# Altium PCB PCB2.PcbDoc
Units mil, origin at the board's own origin, x right, y up, seen from the top; angles counter-clockwise.
Board outline 6000 x 4000 mil, 2 copper layers (Top Layer, Bottom Layer); 31 components, 25 nets, 180 pads, 0 vias.
Unrouted connection lines stored in the file: 85.
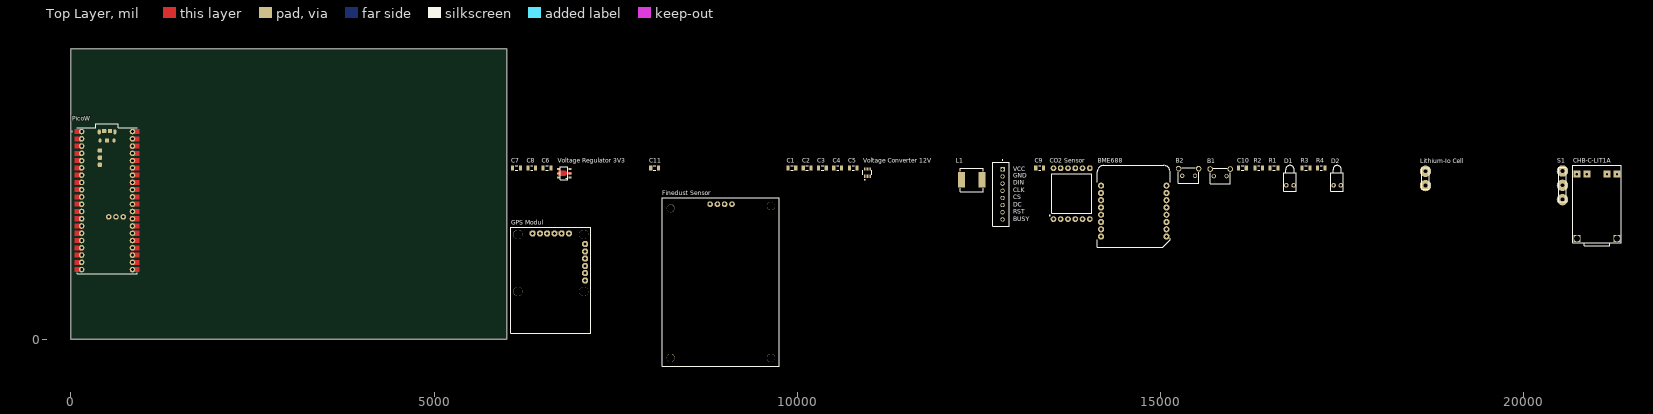
[diagram p0: Top Layer view]
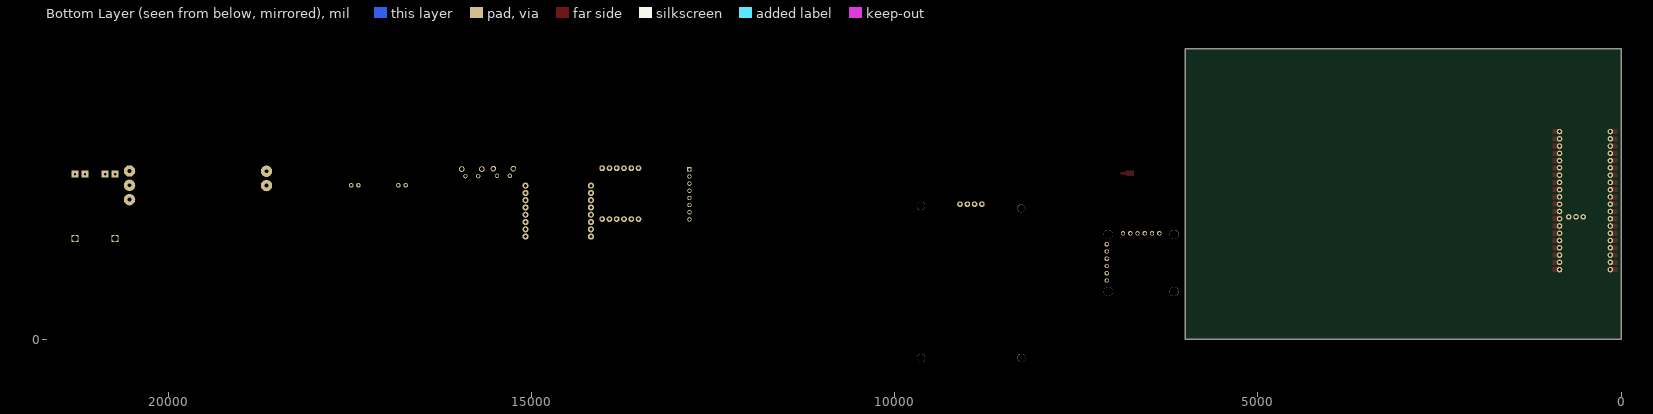
[diagram p1: Bottom Layer view, seen from below]

## Layer stack, top to bottom
Top Solder: solder mask 0.4, Solder Resist, Dk 3.5
Top Layer: signal copper 1.4
Dielectric 1: dielectric 12.6, FR-4, Dk 4.8
Bottom Layer: signal copper 1.4
Bottom Solder: solder mask 0.4, Solder Resist, Dk 3.5

## Board outline
0,0 6000,0 6000,4000 0,4000

## Design rules (kind name [scope] priority, off if disabled: settings)
Clearance [All] p1: gap=10 ignorepadtopadclearanceinfootprint=FALSE
PolygonConnect [All] p1: connectstyle=Relief reliefconductorwidth=10 reliefentries=4 polygonreliefangle="90 Angle" airgapwidth=10
RoutingVias [All] p1: holewidth=28 width=50 viastyle="Through Hole" minholewidth=28 minwidth=50 maxholewidth=28 maxwidth=50
SolderMaskExpansion [All] p1: expansion=4 istentingtop=FALSE
Width [All] p1: maxlimit=10 minlimit=10 preferedwidth=10
30 further rules are at their usual default settings.

## Components (designator, comment, footprint, x,y, rotation, side; value= is the part's Value field where it differs from the comment)
B1 "Button" TE_2-1825027-0 15820,2295 r0 top
B2 "Button" TE_2-1825027-0 15385,2300 r0 top
BME688 "" MIKROE-4893 14180,1415 r0 top
C1 "Cap" C1206 9925,2360 r0 top value=4.7uF
C2 "Cap" C1206 10135,2360 r0 top value=4.7uF
C3 "Cap" C1206 10345,2360 r0 top value=47uF
C4 "Cap" C1206 10555,2360 r0 top value=470pF
C5 "Cap" C1206 10770,2360 r0 top value=100nF
C6 "Cap" C1206 6555,2360 r0 top value=4.7uF
C7 "Cap" C1206 6135,2360 r0 top value=4.7uF
C8 "Cap" C1206 6345,2360 r0 top value=100nF
C9 "Cap" C1206 13335,2360 r0 top value=4.7uF
C10 "Cap" C1206 16125,2360 r0 top value=4.7uF
C11 "Cap" C1206 8035,2360 r0 top value=4.7uF
CHB-C-LIT1A "Name" "DEBO1 3.7LI 1.0A Entwicklerboards" 21005,1330 r0 top
"CO2 Sensor" "PASCO2V01" IFX-SMD-LG-MLGA-14-1-V_MODUL 13525,1655 r90 top
D1 "LED-G" LED-1 16780,2120 r90 top
D2 "LED-R" LED-1 17430,2120 r90 top
"Finedust Sensor" "HM3301" HM3301 9100,1860 r90 top
"GPS Modul" "CAM-M8Q Breakout" CAM-M8Q-Breakout 7080,810 r90 top
L1 "Inductor" IHLP3232DZER330M11 12400,2195 r0 top value=10uH
"Lithium-Io Cell" "CON2" KL-2 18645,2215 r90 top
PicoW "SC0915" MODULE_SC0915 500,1910 r0 top
R1 "RES" C1206 16560,2360 r0 top value=220
R2 "RES" C1206 16350,2360 r0 top value=220
R3 "120k" C1206 17000,2360 r0 top
R4 "120k" C1206 17210,2360 r0 top
S1 "Power Switch" KL-3 20530,2120 r90 top
"Voltage Converter 12V" "TLV61046ADBVR" SOT95P280X145-6N 10965,2295 r90 top
"Voltage Regulator 3V3" "NJM12856" SOT89-5 6780,2285 r90 top
? "E-Ink" e-paper 12825,2340 r0 top

## Footprints (in the part's own frame and the unit in brackets; to place one, negate y for a bottom-side part, rotate by r counter-clockwise, add the part's x,y. Pads: shape width x height; smd on the part's side, far side on the other; paste and mask are expansions set on the pad)
C1206 [mm] "Chip Capacitor, Body 3.2x1.6mm, IPC High Density"
  rect 1.1x1.7 smd: 1(-1.35,0) 2(1.35,0)
  silkscreen extent -0.4,-0.75 0.4,0.75, body extent -1.7,-0.9 1.7,0.9, height 1.3
CAM-M8Q-Breakout [mm] "https://github.com/watterott/CAM-M8Q-Breakout/blob/master/hardware/CAM-M8Q-Breakout_v12.pdf"
  oct 2.1x2.1 / inner round 1.393 / far side oct 1.508x1.508 hole 1.05: 1(0,0) 2(2.54,0) 3(5.08,0) 4(7.62,0) 5(10.16,0) 6(12.7,0) 7(16.51,5.65) 8(16.51,8.19) 9(16.51,10.73) 10(16.51,13.27) 11(16.51,15.81) 12(16.51,18.35)
  round 3.2 hole 3.2 unplated: MH1(-3.867,0.5) MH2(-3.867,23.5) MH3(16.133,23.5) MH4(16.133,0.5)
  silkscreen extent -18.37,-2 18.63,26
"DEBO1 3.7LI 1.0A Entwicklerboards" [mm]
  rect 2.5x2.5 hole 0.85: 1(-7,24) 2(-3.5,24) 3(3.5,24) 4(7,24)
  rect 2.5x2.5 hole 2: 5(-7,1.5) 6(7,1.5)
  silkscreen extent -8.5,-1 8.5,27
e-paper [mm]
  rect 1.508x1.508 / inner round 1.508 / far side rect 1.508x1.508 hole 1: 1(0,0)
  round 1.508 hole 1: 2(0,-2.5) 3(0,-5) 4(0,-7.5) 5(0,-10) 6(0,-12.5) 7(0,-15) 8(0,-17.5)
  silkscreen extent -3.4,-19.95 2.35,3.35, body extent -3.4,-19.95 2.35,2.45, height 7
HM3301 [mm]
  round 2.8 hole 2.8: 1(-53.7,-13.6) 1(-53.7,21.4) 1(-1.45,21.4) 1(-0.7,-13.6)
  round 2 hole 1.05: 3.3V(0,7.62) GND(0,0) SCL(0,2.54) SDA(0,5.08)
  silkscreen extent -56.7,-16.6 2.3,24.4
IFX-SMD-LG-MLGA-14-1-V_MODUL [mm] "Module, 2.54 mm Pitch, 14 Pin, 14.00 mm W X 13.80 mm L X 7.68 mm H Body"
  round 2 hole 1.05: 3.3(0,0) 12V(17.78,0) GND(17.78,-10.16) INT(17.78,-7.62) PSEL(17.78,-5.08) PWM(17.78,-2.54) PWM_DIS(0,-10.16) RX(0,-2.54) SCL(0,-5.08) SWCLK(17.78,-12.7) SWD(0,-12.7) TX_SDA(0,-7.62)
  silkscreen extent 1.15,-13.35 15.79,1.39, body extent 1.99,-13.35 15.79,0.65, height 18.88
IHLP3232DZER330M11 [mil]
  rect 95x210 smd: 1(-142.48,0) 2(142.48,0)
  silkscreen extent -161,-161 161,161
KL-2 [mm]
  round 4 hole 1.35: 1(-2.5,0) 2(2.5,0)
  silkscreen extent -3.81,-1.27 3.81,1.27
KL-3 [mm]
  round 4 hole 1.35: 1(-5,0) 2(0,0) 3(5,0)
  silkscreen extent -5.71,-1.27 6.35,1.27
LED-1 [mm] "LED; 2 Leads"
  round 1.6 hole 0.8: 1(0,1.27) 2(0,-1.27)
  silkscreen extent -2,-2.2 6.95,2.2
MIKROE-4893 [mm] "https://www.mikroe.com/environment-3-click#/298-input_voltage-3_3v"
  round 2.15 hole 1.15: 1(0,17.78) 2(0,15.24) 3(0,12.7) 4(0,10.16) 5(0,7.62) 6(0,5.08) 7(0,2.54) 8(0,0) 9(22.86,0) 10(22.86,2.54) 11(22.86,5.08) 12(22.86,7.62) 13(22.86,10.16) 14(22.86,12.7) 15(22.86,15.24) 16(22.86,17.78)
  silkscreen extent -1.28,-3.72 24.12,24.85, body extent -1.4,-3.81 24.38,24.77, height 13.28
MODULE_SC0915 [mm]
  round 1.95 hole 0.95: 1(-8.89,24.13) 2(-8.89,21.59) 3(-8.89,19.05) 4(-8.89,16.51) 5(-8.89,13.97) 6(-8.89,11.43) 7(-8.89,8.89) 8(-8.89,6.35) 9(-8.89,3.81) 10(-8.89,1.27) 11(-8.89,-1.27) 12(-8.89,-3.81) 13(-8.89,-6.35) 14(-8.89,-8.89) 15(-8.89,-11.43) 16(-8.89,-13.97) 17(-8.89,-16.51) 18(-8.89,-19.05) 19(-8.89,-21.59) 20(-8.89,-24.13) 21(8.89,-24.13) 22(8.89,-21.59) 23(8.89,-19.05) 24(8.89,-16.51) 25(8.89,-13.97) 26(8.89,-11.43) 27(8.89,-8.89) 28(8.89,-6.35) 29(8.89,-3.81) 30(8.89,-1.27) 31(8.89,1.27) 32(8.89,3.81) 33(8.89,6.35) 34(8.89,8.89) 35(8.89,11.43) 36(8.89,13.97) 37(8.89,16.51) 38(8.89,19.05) 39(8.89,21.59) 40(8.89,24.13) D1(0.584,-5.7) D2(3.124,-5.7) D3(5.664,-5.7)
  oval 1.1x1.8 smd: A(-2.725,24) B(2.725,24)
  oval 1.05x1.45 smd: C(-2.425,20.97) D(2.425,20.97)
  rrect40% 1.5x1.5 smd: TP1(0,21) TP2(1,24.3) TP3(-1,24.3) TP4(-2.5,17.5) TP5(-2.5,15) TP6(-2.5,12.5)
  Top Layer region: -8.848,24.929 -8.806,24.926 -8.765,24.92 -8.724,24.913 -8.683,24.903 -8.643,24.891 -8.603,24.877 -8.565,24.861 -8.527,24.843 -8.49,24.823 -8.454,24.801 -8.42,24.777 -8.387,24.752 -8.355,24.725 -8.324,24.696 -8.295,24.665 -8.268,24.633 -8.243,24.6 -8.219,24.566 -8.197,24.53 -8.177,24.493 -8.159,24.455 -8.143,24.417 -8.129,24.377 -8.117,24.337 -8.107,24.296 -8.1,24.255 -8.094,24.214 -8.091,24.172 -8.09,24.13 -8.091,24.088 -8.094,24.046 -8.1,24.005 -8.107,23.964 -8.117,23.923 -8.129,23.883 -8.143,23.843 -8.159,23.805 -8.177,23.767 -8.197,23.73 -8.219,23.694 -8.243,23.66 -8.268,23.627 -8.295,23.595 -8.324,23.564 -8.355,23.535 -8.387,23.508 -8.42,23.483 -8.454,23.459 -8.49,23.437 -8.527,23.417 -8.565,23.399 -8.603,23.383 -8.643,23.369 -8.683,23.357 -8.724,23.347 -8.765,23.34 -8.806,23.334 -8.848,23.331 -8.89,23.33 -11.29,23.33 -11.29,24.93 -8.89,24.93
  Top Layer region: 11.29,-19.85 8.28,-19.85 8.269,-19.849 8.259,-19.848 8.248,-19.846 8.238,-19.843 8.228,-19.84 8.218,-19.837 8.209,-19.833 8.199,-19.828 8.19,-19.823 8.181,-19.818 8.172,-19.812 8.164,-19.805 8.156,-19.799 8.149,-19.791 8.141,-19.784 8.135,-19.776 8.128,-19.768 8.122,-19.759 8.117,-19.75 8.112,-19.741 8.107,-19.731 8.103,-19.722 8.1,-19.712 8.097,-19.702 8.094,-19.692 8.092,-19.681 8.091,-19.671 8.09,-19.66 8.09,-19.65 8.09,-18.45 8.09,-18.44 8.091,-18.429 8.092,-18.419 8.094,-18.408 8.097,-18.398 8.1,-18.388 8.103,-18.378 8.107,-18.369 8.112,-18.359 8.117,-18.35 8.122,-18.341 8.128,-18.332 8.135,-18.324 8.141,-18.316 8.149,-18.309 8.156,-18.301 8.164,-18.295 8.172,-18.288 8.181,-18.282 8.19,-18.277 8.199,-18.272 8.209,-18.267 8.218,-18.263 8.228,-18.26 8.238,-18.257 8.248,-18.254 8.259,-18.252 8.269,-18.251 8.28,-18.25 11.29,-18.25
  Top Layer region: 11.29,5.55 8.28,5.55 8.269,5.551 8.259,5.552 8.248,5.554 8.238,5.557 8.228,5.56 8.218,5.563 8.209,5.567 8.199,5.572 8.19,5.577 8.181,5.582 8.172,5.588 8.164,5.595 8.156,5.601 8.149,5.609 8.141,5.616 8.135,5.624 8.128,5.632 8.122,5.641 8.117,5.65 8.112,5.659 8.107,5.669 8.103,5.678 8.1,5.688 8.097,5.698 8.094,5.708 8.092,5.719 8.091,5.729 8.09,5.74 8.09,5.75 8.09,6.95 8.09,6.96 8.091,6.971 8.092,6.981 8.094,6.992 8.097,7.002 8.1,7.012 8.103,7.022 8.107,7.031 8.112,7.041 8.117,7.05 8.122,7.059 8.128,7.068 8.135,7.076 8.141,7.084 8.149,7.091 8.156,7.099 8.164,7.105 8.172,7.112 8.181,7.118 8.19,7.123 8.199,7.128 8.209,7.133 8.218,7.137 8.228,7.14 8.238,7.143 8.248,7.146 8.259,7.148 8.269,7.149 8.28,7.15 11.29,7.15
  Top Layer region: 11.29,-24.93 8.89,-24.93 8.848,-24.929 8.806,-24.926 8.765,-24.92 8.724,-24.913 8.683,-24.903 8.643,-24.891 8.603,-24.877 8.565,-24.861 8.527,-24.843 8.49,-24.823 8.454,-24.801 8.42,-24.777 8.387,-24.752 8.355,-24.725 8.324,-24.696 8.295,-24.665 8.268,-24.633 8.243,-24.6 8.219,-24.566 8.197,-24.53 8.177,-24.493 8.159,-24.455 8.143,-24.417 8.129,-24.377 8.117,-24.337 8.107,-24.296 8.1,-24.255 8.094,-24.214 8.091,-24.172 8.09,-24.13 8.091,-24.088 8.094,-24.046 8.1,-24.005 8.107,-23.964 8.117,-23.923 8.129,-23.883 8.143,-23.843 8.159,-23.805 8.177,-23.767 8.197,-23.73 8.219,-23.694 8.243,-23.66 8.268,-23.627 8.295,-23.595 8.324,-23.564 8.355,-23.535 8.387,-23.508 8.42,-23.483 8.454,-23.459 8.49,-23.437 8.527,-23.417 8.565,-23.399 8.603,-23.383 8.643,-23.369 8.683,-23.357 8.724,-23.347 8.765,-23.34 8.806,-23.334 8.848,-23.331 8.89,-23.33 11.29,-23.33
  Top Layer region: 11.29,-22.39 8.89,-22.39 8.848,-22.389 8.806,-22.386 8.765,-22.38 8.724,-22.373 8.683,-22.363 8.643,-22.351 8.603,-22.337 8.565,-22.321 8.527,-22.303 8.49,-22.283 8.454,-22.261 8.42,-22.237 8.387,-22.212 8.355,-22.185 8.324,-22.156 8.295,-22.125 8.268,-22.093 8.243,-22.06 8.219,-22.026 8.197,-21.99 8.177,-21.953 8.159,-21.915 8.143,-21.877 8.129,-21.837 8.117,-21.797 8.107,-21.756 8.1,-21.715 8.094,-21.674 8.091,-21.632 8.09,-21.59 8.091,-21.548 8.094,-21.506 8.1,-21.465 8.107,-21.424 8.117,-21.383 8.129,-21.343 8.143,-21.303 8.159,-21.265 8.177,-21.227 8.197,-21.19 8.219,-21.154 8.243,-21.12 8.268,-21.087 8.295,-21.055 8.324,-21.024 8.355,-20.995 8.387,-20.968 8.42,-20.943 8.454,-20.919 8.49,-20.897 8.527,-20.877 8.565,-20.859 8.603,-20.843 8.643,-20.829 8.683,-20.817 8.724,-20.807 8.765,-20.8 8.806,-20.794 8.848,-20.791 8.89,-20.79 11.29,-20.79
  Top Layer region: 11.29,-17.31 8.89,-17.31 8.848,-17.309 8.806,-17.306 8.765,-17.3 8.724,-17.293 8.683,-17.283 8.643,-17.271 8.603,-17.257 8.565,-17.241 8.527,-17.223 8.49,-17.203 8.454,-17.181 8.42,-17.157 8.387,-17.132 8.355,-17.105 8.324,-17.076 8.295,-17.045 8.268,-17.013 8.243,-16.98 8.219,-16.946 8.197,-16.91 8.177,-16.873 8.159,-16.835 8.143,-16.797 8.129,-16.757 8.117,-16.717 8.107,-16.676 8.1,-16.635 8.094,-16.594 8.091,-16.552 8.09,-16.51 8.091,-16.468 8.094,-16.426 8.1,-16.385 8.107,-16.344 8.117,-16.303 8.129,-16.263 8.143,-16.223 8.159,-16.185 8.177,-16.147 8.197,-16.11 8.219,-16.074 8.243,-16.04 8.268,-16.007 8.295,-15.975 8.324,-15.944 8.355,-15.915 8.387,-15.888 8.42,-15.863 8.454,-15.839 8.49,-15.817 8.527,-15.797 8.565,-15.779 8.603,-15.763 8.643,-15.749 8.683,-15.737 8.724,-15.727 8.765,-15.72 8.806,-15.714 8.848,-15.711 8.89,-15.71 11.29,-15.71
  Top Layer region: 11.29,-14.77 8.89,-14.77 8.848,-14.769 8.806,-14.766 8.765,-14.76 8.724,-14.753 8.683,-14.743 8.643,-14.731 8.603,-14.717 8.565,-14.701 8.527,-14.683 8.49,-14.663 8.454,-14.641 8.42,-14.617 8.387,-14.592 8.355,-14.565 8.324,-14.536 8.295,-14.505 8.268,-14.473 8.243,-14.44 8.219,-14.406 8.197,-14.37 8.177,-14.333 8.159,-14.295 8.143,-14.257 8.129,-14.217 8.117,-14.177 8.107,-14.136 8.1,-14.095 8.094,-14.054 8.091,-14.012 8.09,-13.97 8.091,-13.928 8.094,-13.886 8.1,-13.845 8.107,-13.804 8.117,-13.763 8.129,-13.723 8.143,-13.683 8.159,-13.645 8.177,-13.607 8.197,-13.57 8.219,-13.534 8.243,-13.5 8.268,-13.467 8.295,-13.435 8.324,-13.404 8.355,-13.375 8.387,-13.348 8.42,-13.323 8.454,-13.299 8.49,-13.277 8.527,-13.257 8.565,-13.239 8.603,-13.223 8.643,-13.209 8.683,-13.197 8.724,-13.187 8.765,-13.18 8.806,-13.174 8.848,-13.171 8.89,-13.17 11.29,-13.17
  Top Layer region: 11.29,-12.23 8.89,-12.23 8.848,-12.229 8.806,-12.226 8.765,-12.22 8.724,-12.213 8.683,-12.203 8.643,-12.191 8.603,-12.177 8.565,-12.161 8.527,-12.143 8.49,-12.123 8.454,-12.101 8.42,-12.077 8.387,-12.052 8.355,-12.025 8.324,-11.996 8.295,-11.965 8.268,-11.933 8.243,-11.9 8.219,-11.866 8.197,-11.83 8.177,-11.793 8.159,-11.755 8.143,-11.717 8.129,-11.677 8.117,-11.637 8.107,-11.596 8.1,-11.555 8.094,-11.514 8.091,-11.472 8.09,-11.43 8.091,-11.388 8.094,-11.346 8.1,-11.305 8.107,-11.264 8.117,-11.223 8.129,-11.183 8.143,-11.143 8.159,-11.105 8.177,-11.067 8.197,-11.03 8.219,-10.994 8.243,-10.96 8.268,-10.927 8.295,-10.895 8.324,-10.864 8.355,-10.835 8.387,-10.808 8.42,-10.783 8.454,-10.759 8.49,-10.737 8.527,-10.717 8.565,-10.699 8.603,-10.683 8.643,-10.669 8.683,-10.657 8.724,-10.647 8.765,-10.64 8.806,-10.634 8.848,-10.631 8.89,-10.63 11.29,-10.63
  Top Layer region: 11.29,-9.69 8.89,-9.69 8.848,-9.689 8.806,-9.686 8.765,-9.68 8.724,-9.673 8.683,-9.663 8.643,-9.651 8.603,-9.637 8.565,-9.621 8.527,-9.603 8.49,-9.583 8.454,-9.561 8.42,-9.537 8.387,-9.512 8.355,-9.485 8.324,-9.456 8.295,-9.425 8.268,-9.393 8.243,-9.36 8.219,-9.326 8.197,-9.29 8.177,-9.253 8.159,-9.215 8.143,-9.177 8.129,-9.137 8.117,-9.097 8.107,-9.056 8.1,-9.015 8.094,-8.974 8.091,-8.932 8.09,-8.89 8.091,-8.848 8.094,-8.806 8.1,-8.765 8.107,-8.724 8.117,-8.683 8.129,-8.643 8.143,-8.603 8.159,-8.565 8.177,-8.527 8.197,-8.49 8.219,-8.454 8.243,-8.42 8.268,-8.387 8.295,-8.355 8.324,-8.324 8.355,-8.295 8.387,-8.268 8.42,-8.243 8.454,-8.219 8.49,-8.197 8.527,-8.177 8.565,-8.159 8.603,-8.143 8.643,-8.129 8.683,-8.117 8.724,-8.107 8.765,-8.1 8.806,-8.094 8.848,-8.091 8.89,-8.09 11.29,-8.09
  Top Layer region: 11.29,0.47 8.89,0.47 8.848,0.471 8.806,0.474 8.765,0.48 8.724,0.487 8.683,0.497 8.643,0.509 8.603,0.523 8.565,0.539 8.527,0.557 8.49,0.577 8.454,0.599 8.42,0.623 8.387,0.648 8.355,0.675 8.324,0.704 8.295,0.735 8.268,0.767 8.243,0.8 8.219,0.834 8.197,0.87 8.177,0.907 8.159,0.945 8.143,0.983 8.129,1.023 8.117,1.063 8.107,1.104 8.1,1.145 8.094,1.186 8.091,1.228 8.09,1.27 8.091,1.312 8.094,1.354 8.1,1.395 8.107,1.436 8.117,1.477 8.129,1.517 8.143,1.557 8.159,1.595 8.177,1.633 8.197,1.67 8.219,1.706 8.243,1.74 8.268,1.773 8.295,1.805 8.324,1.836 8.355,1.865 8.387,1.892 8.42,1.917 8.454,1.941 8.49,1.963 8.527,1.983 8.565,2.001 8.603,2.017 8.643,2.031 8.683,2.043 8.724,2.053 8.765,2.06 8.806,2.066 8.848,2.069 8.89,2.07 11.29,2.07
  Top Layer region: 11.29,3.01 8.89,3.01 8.848,3.011 8.806,3.014 8.765,3.02 8.724,3.027 8.683,3.037 8.643,3.049 8.603,3.063 8.565,3.079 8.527,3.097 8.49,3.117 8.454,3.139 8.42,3.163 8.387,3.188 8.355,3.215 8.324,3.244 8.295,3.275 8.268,3.307 8.243,3.34 8.219,3.374 8.197,3.41 8.177,3.447 8.159,3.485 8.143,3.523 8.129,3.563 8.117,3.603 8.107,3.644 8.1,3.685 8.094,3.726 8.091,3.768 8.09,3.81 8.091,3.852 8.094,3.894 8.1,3.935 8.107,3.976 8.117,4.017 8.129,4.057 8.143,4.097 8.159,4.135 8.177,4.173 8.197,4.21 8.219,4.246 8.243,4.28 8.268,4.313 8.295,4.345 8.324,4.376 8.355,4.405 8.387,4.432 8.42,4.457 8.454,4.481 8.49,4.503 8.527,4.523 8.565,4.541 8.603,4.557 8.643,4.571 8.683,4.583 8.724,4.593 8.765,4.6 8.806,4.606 8.848,4.609 8.89,4.61 11.29,4.61
  Top Layer region: 11.29,8.09 8.89,8.09 8.848,8.091 8.806,8.094 8.765,8.1 8.724,8.107 8.683,8.117 8.643,8.129 8.603,8.143 8.565,8.159 8.527,8.177 8.49,8.197 8.454,8.219 8.42,8.243 8.387,8.268 8.355,8.295 8.324,8.324 8.295,8.355 8.268,8.387 8.243,8.42 8.219,8.454 8.197,8.49 8.177,8.527 8.159,8.565 8.143,8.603 8.129,8.643 8.117,8.683 8.107,8.724 8.1,8.765 8.094,8.806 8.091,8.848 8.09,8.89 8.091,8.932 8.094,8.974 8.1,9.015 8.107,9.056 8.117,9.097 8.129,9.137 8.143,9.177 8.159,9.215 8.177,9.253 8.197,9.29 8.219,9.326 8.243,9.36 8.268,9.393 8.295,9.425 8.324,9.456 8.355,9.485 8.387,9.512 8.42,9.537 8.454,9.561 8.49,9.583 8.527,9.603 8.565,9.621 8.603,9.637 8.643,9.651 8.683,9.663 8.724,9.673 8.765,9.68 8.806,9.686 8.848,9.689 8.89,9.69 11.29,9.69
  Top Layer region: 11.29,13.17 8.89,13.17 8.848,13.171 8.806,13.174 8.765,13.18 8.724,13.187 8.683,13.197 8.643,13.209 8.603,13.223 8.565,13.239 8.527,13.257 8.49,13.277 8.454,13.299 8.42,13.323 8.387,13.348 8.355,13.375 8.324,13.404 8.295,13.435 8.268,13.467 8.243,13.5 8.219,13.534 8.197,13.57 8.177,13.607 8.159,13.645 8.143,13.683 8.129,13.723 8.117,13.763 8.107,13.804 8.1,13.845 8.094,13.886 8.091,13.928 8.09,13.97 8.091,14.012 8.094,14.054 8.1,14.095 8.107,14.136 8.117,14.177 8.129,14.217 8.143,14.257 8.159,14.295 8.177,14.333 8.197,14.37 8.219,14.406 8.243,14.44 8.268,14.473 8.295,14.505 8.324,14.536 8.355,14.565 8.387,14.592 8.42,14.617 8.454,14.641 8.49,14.663 8.527,14.683 8.565,14.701 8.603,14.717 8.643,14.731 8.683,14.743 8.724,14.753 8.765,14.76 8.806,14.766 8.848,14.769 8.89,14.77 11.29,14.77
  Top Layer region: 11.29,15.71 8.89,15.71 8.848,15.711 8.806,15.714 8.765,15.72 8.724,15.727 8.683,15.737 8.643,15.749 8.603,15.763 8.565,15.779 8.527,15.797 8.49,15.817 8.454,15.839 8.42,15.863 8.387,15.888 8.355,15.915 8.324,15.944 8.295,15.975 8.268,16.007 8.243,16.04 8.219,16.074 8.197,16.11 8.177,16.147 8.159,16.185 8.143,16.223 8.129,16.263 8.117,16.303 8.107,16.344 8.1,16.385 8.094,16.426 8.091,16.468 8.09,16.51 8.091,16.552 8.094,16.594 8.1,16.635 8.107,16.676 8.117,16.717 8.129,16.757 8.143,16.797 8.159,16.835 8.177,16.873 8.197,16.91 8.219,16.946 8.243,16.98 8.268,17.013 8.295,17.045 8.324,17.076 8.355,17.105 8.387,17.132 8.42,17.157 8.454,17.181 8.49,17.203 8.527,17.223 8.565,17.241 8.603,17.257 8.643,17.271 8.683,17.283 8.724,17.293 8.765,17.3 8.806,17.306 8.848,17.309 8.89,17.31 11.29,17.31
  Top Layer region: 11.29,23.33 8.89,23.33 8.848,23.331 8.806,23.334 8.765,23.34 8.724,23.347 8.683,23.357 8.643,23.369 8.603,23.383 8.565,23.399 8.527,23.417 8.49,23.437 8.454,23.459 8.42,23.483 8.387,23.508 8.355,23.535 8.324,23.564 8.295,23.595 8.268,23.627 8.243,23.66 8.219,23.694 8.197,23.73 8.177,23.767 8.159,23.805 8.143,23.843 8.129,23.883 8.117,23.923 8.107,23.964 8.1,24.005 8.094,24.046 8.091,24.088 8.09,24.13 8.091,24.172 8.094,24.214 8.1,24.255 8.107,24.296 8.117,24.337 8.129,24.377 8.143,24.417 8.159,24.455 8.177,24.493 8.197,24.53 8.219,24.566 8.243,24.6 8.268,24.633 8.295,24.665 8.324,24.696 8.355,24.725 8.387,24.752 8.42,24.777 8.454,24.801 8.49,24.823 8.527,24.843 8.565,24.861 8.603,24.877 8.643,24.891 8.683,24.903 8.724,24.913 8.765,24.92 8.806,24.926 8.848,24.929 8.89,24.93 11.29,24.93
  Top Layer region: 11.29,-7.15 8.28,-7.15 8.269,-7.149 8.259,-7.148 8.248,-7.146 8.238,-7.143 8.228,-7.14 8.218,-7.137 8.209,-7.133 8.199,-7.128 8.19,-7.123 8.181,-7.118 8.172,-7.112 8.164,-7.105 8.156,-7.099 8.149,-7.091 8.141,-7.084 8.135,-7.076 8.128,-7.068 8.122,-7.059 8.117,-7.05 8.112,-7.041 8.107,-7.031 8.103,-7.022 8.1,-7.012 8.097,-7.002 8.094,-6.992 8.092,-6.981 8.091,-6.971 8.09,-6.96 8.09,-6.95 8.09,-5.75 8.09,-5.74 8.091,-5.729 8.092,-5.719 8.094,-5.708 8.097,-5.698 8.1,-5.688 8.103,-5.678 8.107,-5.669 8.112,-5.659 8.117,-5.65 8.122,-5.641 8.128,-5.632 8.135,-5.624 8.141,-5.616 8.149,-5.609 8.156,-5.601 8.164,-5.595 8.172,-5.588 8.181,-5.582 8.19,-5.577 8.199,-5.572 8.209,-5.567 8.218,-5.563 8.228,-5.56 8.238,-5.557 8.248,-5.554 8.259,-5.552 8.269,-5.551 8.28,-5.55 11.29,-5.55
  Top Layer region: 11.29,-4.61 8.89,-4.61 8.848,-4.609 8.806,-4.606 8.765,-4.6 8.724,-4.593 8.683,-4.583 8.643,-4.571 8.603,-4.557 8.565,-4.541 8.527,-4.523 8.49,-4.503 8.454,-4.481 8.42,-4.457 8.387,-4.432 8.355,-4.405 8.324,-4.376 8.295,-4.345 8.268,-4.313 8.243,-4.28 8.219,-4.246 8.197,-4.21 8.177,-4.173 8.159,-4.135 8.143,-4.097 8.129,-4.057 8.117,-4.017 8.107,-3.976 8.1,-3.935 8.094,-3.894 8.091,-3.852 8.09,-3.81 8.091,-3.768 8.094,-3.726 8.1,-3.685 8.107,-3.644 8.117,-3.603 8.129,-3.563 8.143,-3.523 8.159,-3.485 8.177,-3.447 8.197,-3.41 8.219,-3.374 8.243,-3.34 8.268,-3.307 8.295,-3.275 8.324,-3.244 8.355,-3.215 8.387,-3.188 8.42,-3.163 8.454,-3.139 8.49,-3.117 8.527,-3.097 8.565,-3.079 8.603,-3.063 8.643,-3.049 8.683,-3.037 8.724,-3.027 8.765,-3.02 8.806,-3.014 8.848,-3.011 8.89,-3.01 11.29,-3.01
  Top Layer region: 11.29,-2.07 8.89,-2.07 8.848,-2.069 8.806,-2.066 8.765,-2.06 8.724,-2.053 8.683,-2.043 8.643,-2.031 8.603,-2.017 8.565,-2.001 8.527,-1.983 8.49,-1.963 8.454,-1.941 8.42,-1.917 8.387,-1.892 8.355,-1.865 8.324,-1.836 8.295,-1.805 8.268,-1.773 8.243,-1.74 8.219,-1.706 8.197,-1.67 8.177,-1.633 8.159,-1.595 8.143,-1.557 8.129,-1.517 8.117,-1.477 8.107,-1.436 8.1,-1.395 8.094,-1.354 8.091,-1.312 8.09,-1.27 8.091,-1.228 8.094,-1.186 8.1,-1.145 8.107,-1.104 8.117,-1.063 8.129,-1.023 8.143,-0.983 8.159,-0.945 8.177,-0.907 8.197,-0.87 8.219,-0.834 8.243,-0.8 8.268,-0.767 8.295,-0.735 8.324,-0.704 8.355,-0.675 8.387,-0.648 8.42,-0.623 8.454,-0.599 8.49,-0.577 8.527,-0.557 8.565,-0.539 8.603,-0.523 8.643,-0.509 8.683,-0.497 8.724,-0.487 8.765,-0.48 8.806,-0.474 8.848,-0.471 8.89,-0.47 11.29,-0.47
  Top Layer region: 11.29,10.63 8.89,10.63 8.848,10.631 8.806,10.634 8.765,10.64 8.724,10.647 8.683,10.657 8.643,10.669 8.603,10.683 8.565,10.699 8.527,10.717 8.49,10.737 8.454,10.759 8.42,10.783 8.387,10.808 8.355,10.835 8.324,10.864 8.295,10.895 8.268,10.927 8.243,10.96 8.219,10.994 8.197,11.03 8.177,11.067 8.159,11.105 8.143,11.143 8.129,11.183 8.117,11.223 8.107,11.264 8.1,11.305 8.094,11.346 8.091,11.388 8.09,11.43 8.091,11.472 8.094,11.514 8.1,11.555 8.107,11.596 8.117,11.637 8.129,11.677 8.143,11.717 8.159,11.755 8.177,11.793 8.197,11.83 8.219,11.866 8.243,11.9 8.268,11.933 8.295,11.965 8.324,11.996 8.355,12.025 8.387,12.052 8.42,12.077 8.454,12.101 8.49,12.123 8.527,12.143 8.565,12.161 8.603,12.177 8.643,12.191 8.683,12.203 8.724,12.213 8.765,12.22 8.806,12.226 8.848,12.229 8.89,12.23 11.29,12.23
  Top Layer region: 11.29,20.79 8.89,20.79 8.848,20.791 8.806,20.794 8.765,20.8 8.724,20.807 8.683,20.817 8.643,20.829 8.603,20.843 8.565,20.859 8.527,20.877 8.49,20.897 8.454,20.919 8.42,20.943 8.387,20.968 8.355,20.995 8.324,21.024 8.295,21.055 8.268,21.087 8.243,21.12 8.219,21.154 8.197,21.19 8.177,21.227 8.159,21.265 8.143,21.303 8.129,21.343 8.117,21.383 8.107,21.424 8.1,21.465 8.094,21.506 8.091,21.548 8.09,21.59 8.091,21.632 8.094,21.674 8.1,21.715 8.107,21.756 8.117,21.797 8.129,21.837 8.143,21.877 8.159,21.915 8.177,21.953 8.197,21.99 8.219,22.026 8.243,22.06 8.268,22.093 8.295,22.125 8.324,22.156 8.355,22.185 8.387,22.212 8.42,22.237 8.454,22.261 8.49,22.283 8.527,22.303 8.565,22.321 8.603,22.337 8.643,22.351 8.683,22.363 8.724,22.373 8.765,22.38 8.806,22.386 8.848,22.389 8.89,22.39 11.29,22.39
  Top Layer region: 11.29,18.25 8.28,18.25 8.269,18.251 8.259,18.252 8.248,18.254 8.238,18.257 8.228,18.26 8.218,18.263 8.209,18.267 8.199,18.272 8.19,18.277 8.181,18.282 8.172,18.288 8.164,18.295 8.156,18.301 8.149,18.309 8.141,18.316 8.135,18.324 8.128,18.332 8.122,18.341 8.117,18.35 8.112,18.359 8.107,18.369 8.103,18.378 8.1,18.388 8.097,18.398 8.094,18.408 8.092,18.419 8.091,18.429 8.09,18.44 8.09,18.45 8.09,19.65 8.09,19.66 8.091,19.671 8.092,19.681 8.094,19.692 8.097,19.702 8.1,19.712 8.103,19.722 8.107,19.731 8.112,19.741 8.117,19.75 8.122,19.759 8.128,19.768 8.135,19.776 8.141,19.784 8.149,19.791 8.156,19.799 8.164,19.805 8.172,19.812 8.181,19.818 8.19,19.823 8.199,19.828 8.209,19.833 8.218,19.837 8.228,19.84 8.238,19.843 8.248,19.846 8.259,19.848 8.269,19.849 8.28,19.85 11.29,19.85
  Top Layer region: -8.848,9.689 -8.806,9.686 -8.765,9.68 -8.724,9.673 -8.683,9.663 -8.643,9.651 -8.603,9.637 -8.565,9.621 -8.527,9.603 -8.49,9.583 -8.454,9.561 -8.42,9.537 -8.387,9.512 -8.355,9.485 -8.324,9.456 -8.295,9.425 -8.268,9.393 -8.243,9.36 -8.219,9.326 -8.197,9.29 -8.177,9.253 -8.159,9.215 -8.143,9.177 -8.129,9.137 -8.117,9.097 -8.107,9.056 -8.1,9.015 -8.094,8.974 -8.091,8.932 -8.09,8.89 -8.091,8.848 -8.094,8.806 -8.1,8.765 -8.107,8.724 -8.117,8.683 -8.129,8.643 -8.143,8.603 -8.159,8.565 -8.177,8.527 -8.197,8.49 -8.219,8.454 -8.243,8.42 -8.268,8.387 -8.295,8.355 -8.324,8.324 -8.355,8.295 -8.387,8.268 -8.42,8.243 -8.454,8.219 -8.49,8.197 -8.527,8.177 -8.565,8.159 -8.603,8.143 -8.643,8.129 -8.683,8.117 -8.724,8.107 -8.765,8.1 -8.806,8.094 -8.848,8.091 -8.89,8.09 -11.29,8.09 -11.29,9.69 -8.89,9.69
  Top Layer region: -8.848,12.229 -8.806,12.226 -8.765,12.22 -8.724,12.213 -8.683,12.203 -8.643,12.191 -8.603,12.177 -8.565,12.161 -8.527,12.143 -8.49,12.123 -8.454,12.101 -8.42,12.077 -8.387,12.052 -8.355,12.025 -8.324,11.996 -8.295,11.965 -8.268,11.933 -8.243,11.9 -8.219,11.866 -8.197,11.83 -8.177,11.793 -8.159,11.755 -8.143,11.717 -8.129,11.677 -8.117,11.637 -8.107,11.596 -8.1,11.555 -8.094,11.514 -8.091,11.472 -8.09,11.43 -8.091,11.388 -8.094,11.346 -8.1,11.305 -8.107,11.264 -8.117,11.223 -8.129,11.183 -8.143,11.143 -8.159,11.105 -8.177,11.067 -8.197,11.03 -8.219,10.994 -8.243,10.96 -8.268,10.927 -8.295,10.895 -8.324,10.864 -8.355,10.835 -8.387,10.808 -8.42,10.783 -8.454,10.759 -8.49,10.737 -8.527,10.717 -8.565,10.699 -8.603,10.683 -8.643,10.669 -8.683,10.657 -8.724,10.647 -8.765,10.64 -8.806,10.634 -8.848,10.631 -8.89,10.63 -11.29,10.63 -11.29,12.23 -8.89,12.23
  Top Layer region: -8.848,14.769 -8.806,14.766 -8.765,14.76 -8.724,14.753 -8.683,14.743 -8.643,14.731 -8.603,14.717 -8.565,14.701 -8.527,14.683 -8.49,14.663 -8.454,14.641 -8.42,14.617 -8.387,14.592 -8.355,14.565 -8.324,14.536 -8.295,14.505 -8.268,14.473 -8.243,14.44 -8.219,14.406 -8.197,14.37 -8.177,14.333 -8.159,14.295 -8.143,14.257 -8.129,14.217 -8.117,14.177 -8.107,14.136 -8.1,14.095 -8.094,14.054 -8.091,14.012 -8.09,13.97 -8.091,13.928 -8.094,13.886 -8.1,13.845 -8.107,13.804 -8.117,13.763 -8.129,13.723 -8.143,13.683 -8.159,13.645 -8.177,13.607 -8.197,13.57 -8.219,13.534 -8.243,13.5 -8.268,13.467 -8.295,13.435 -8.324,13.404 -8.355,13.375 -8.387,13.348 -8.42,13.323 -8.454,13.299 -8.49,13.277 -8.527,13.257 -8.565,13.239 -8.603,13.223 -8.643,13.209 -8.683,13.197 -8.724,13.187 -8.765,13.18 -8.806,13.174 -8.848,13.171 -8.89,13.17 -11.29,13.17 -11.29,14.77 -8.89,14.77
  Top Layer region: -8.848,17.309 -8.806,17.306 -8.765,17.3 -8.724,17.293 -8.683,17.283 -8.643,17.271 -8.603,17.257 -8.565,17.241 -8.527,17.223 -8.49,17.203 -8.454,17.181 -8.42,17.157 -8.387,17.132 -8.355,17.105 -8.324,17.076 -8.295,17.045 -8.268,17.013 -8.243,16.98 -8.219,16.946 -8.197,16.91 -8.177,16.873 -8.159,16.835 -8.143,16.797 -8.129,16.757 -8.117,16.717 -8.107,16.676 -8.1,16.635 -8.094,16.594 -8.091,16.552 -8.09,16.51 -8.091,16.468 -8.094,16.426 -8.1,16.385 -8.107,16.344 -8.117,16.303 -8.129,16.263 -8.143,16.223 -8.159,16.185 -8.177,16.147 -8.197,16.11 -8.219,16.074 -8.243,16.04 -8.268,16.007 -8.295,15.975 -8.324,15.944 -8.355,15.915 -8.387,15.888 -8.42,15.863 -8.454,15.839 -8.49,15.817 -8.527,15.797 -8.565,15.779 -8.603,15.763 -8.643,15.749 -8.683,15.737 -8.724,15.727 -8.765,15.72 -8.806,15.714 -8.848,15.711 -8.89,15.71 -11.29,15.71 -11.29,17.31 -8.89,17.31
  Top Layer region: -8.848,22.389 -8.806,22.386 -8.765,22.38 -8.724,22.373 -8.683,22.363 -8.643,22.351 -8.603,22.337 -8.565,22.321 -8.527,22.303 -8.49,22.283 -8.454,22.261 -8.42,22.237 -8.387,22.212 -8.355,22.185 -8.324,22.156 -8.295,22.125 -8.268,22.093 -8.243,22.06 -8.219,22.026 -8.197,21.99 -8.177,21.953 -8.159,21.915 -8.143,21.877 -8.129,21.837 -8.117,21.797 -8.107,21.756 -8.1,21.715 -8.094,21.674 -8.091,21.632 -8.09,21.59 -8.091,21.548 -8.094,21.506 -8.1,21.465 -8.107,21.424 -8.117,21.383 -8.129,21.343 -8.143,21.303 -8.159,21.265 -8.177,21.227 -8.197,21.19 -8.219,21.154 -8.243,21.12 -8.268,21.087 -8.295,21.055 -8.324,21.024 -8.355,20.995 -8.387,20.968 -8.42,20.943 -8.454,20.919 -8.49,20.897 -8.527,20.877 -8.565,20.859 -8.603,20.843 -8.643,20.829 -8.683,20.817 -8.724,20.807 -8.765,20.8 -8.806,20.794 -8.848,20.791 -8.89,20.79 -11.29,20.79 -11.29,22.39 -8.89,22.39
  Top Layer region: -8.269,-18.251 -8.259,-18.252 -8.248,-18.254 -8.238,-18.257 -8.228,-18.26 -8.218,-18.263 -8.209,-18.267 -8.199,-18.272 -8.19,-18.277 -8.181,-18.282 -8.172,-18.288 -8.164,-18.295 -8.156,-18.301 -8.149,-18.309 -8.141,-18.316 -8.135,-18.324 -8.128,-18.332 -8.122,-18.341 -8.117,-18.35 -8.112,-18.359 -8.107,-18.369 -8.103,-18.378 -8.1,-18.388 -8.097,-18.398 -8.094,-18.408 -8.092,-18.419 -8.091,-18.429 -8.09,-18.44 -8.09,-18.45 -8.09,-19.65 -8.09,-19.66 -8.091,-19.671 -8.092,-19.681 -8.094,-19.692 -8.097,-19.702 -8.1,-19.712 -8.103,-19.722 -8.107,-19.731 -8.112,-19.741 -8.117,-19.75 -8.122,-19.759 -8.128,-19.768 -8.135,-19.776 -8.141,-19.784 -8.149,-19.791 -8.156,-19.799 -8.164,-19.805 -8.172,-19.812 -8.181,-19.818 -8.19,-19.823 -8.199,-19.828 -8.209,-19.833 -8.218,-19.837 -8.228,-19.84 -8.238,-19.843 -8.248,-19.846 -8.259,-19.848 -8.269,-19.849 -8.28,-19.85 -11.29,-19.85 -11.29,-18.25 -8.28,-18.25
  Top Layer region: -8.269,-5.551 -8.259,-5.552 -8.248,-5.554 -8.238,-5.557 -8.228,-5.56 -8.218,-5.563 -8.209,-5.567 -8.199,-5.572 -8.19,-5.577 -8.181,-5.582 -8.172,-5.588 -8.164,-5.595 -8.156,-5.601 -8.149,-5.609 -8.141,-5.616 -8.135,-5.624 -8.128,-5.632 -8.122,-5.641 -8.117,-5.65 -8.112,-5.659 -8.107,-5.669 -8.103,-5.678 -8.1,-5.688 -8.097,-5.698 -8.094,-5.708 -8.092,-5.719 -8.091,-5.729 -8.09,-5.74 -8.09,-5.75 -8.09,-6.95 -8.09,-6.96 -8.091,-6.971 -8.092,-6.981 -8.094,-6.992 -8.097,-7.002 -8.1,-7.012 -8.103,-7.022 -8.107,-7.031 -8.112,-7.041 -8.117,-7.05 -8.122,-7.059 -8.128,-7.068 -8.135,-7.076 -8.141,-7.084 -8.149,-7.091 -8.156,-7.099 -8.164,-7.105 -8.172,-7.112 -8.181,-7.118 -8.19,-7.123 -8.199,-7.128 -8.209,-7.133 -8.218,-7.137 -8.228,-7.14 -8.238,-7.143 -8.248,-7.146 -8.259,-7.148 -8.269,-7.149 -8.28,-7.15 -11.29,-7.15 -11.29,-5.55 -8.28,-5.55
  Top Layer region: -8.269,7.149 -8.259,7.148 -8.248,7.146 -8.238,7.143 -8.228,7.14 -8.218,7.137 -8.209,7.133 -8.199,7.128 -8.19,7.123 -8.181,7.118 -8.172,7.112 -8.164,7.105 -8.156,7.099 -8.149,7.091 -8.141,7.084 -8.135,7.076 -8.128,7.068 -8.122,7.059 -8.117,7.05 -8.112,7.041 -8.107,7.031 -8.103,7.022 -8.1,7.012 -8.097,7.002 -8.094,6.992 -8.092,6.981 -8.091,6.971 -8.09,6.96 -8.09,6.95 -8.09,5.75 -8.09,5.74 -8.091,5.729 -8.092,5.719 -8.094,5.708 -8.097,5.698 -8.1,5.688 -8.103,5.678 -8.107,5.669 -8.112,5.659 -8.117,5.65 -8.122,5.641 -8.128,5.632 -8.135,5.624 -8.141,5.616 -8.149,5.609 -8.156,5.601 -8.164,5.595 -8.172,5.588 -8.181,5.582 -8.19,5.577 -8.199,5.572 -8.209,5.567 -8.218,5.563 -8.228,5.56 -8.238,5.557 -8.248,5.554 -8.259,5.552 -8.269,5.551 -8.28,5.55 -11.29,5.55 -11.29,7.15 -8.28,7.15
  Top Layer region: -8.269,19.849 -8.259,19.848 -8.248,19.846 -8.238,19.843 -8.228,19.84 -8.218,19.837 -8.209,19.833 -8.199,19.828 -8.19,19.823 -8.181,19.818 -8.172,19.812 -8.164,19.805 -8.156,19.799 -8.149,19.791 -8.141,19.784 -8.135,19.776 -8.128,19.768 -8.122,19.759 -8.117,19.75 -8.112,19.741 -8.107,19.731 -8.103,19.722 -8.1,19.712 -8.097,19.702 -8.094,19.692 -8.092,19.681 -8.091,19.671 -8.09,19.66 -8.09,19.65 -8.09,18.45 -8.09,18.44 -8.091,18.429 -8.092,18.419 -8.094,18.408 -8.097,18.398 -8.1,18.388 -8.103,18.378 -8.107,18.369 -8.112,18.359 -8.117,18.35 -8.122,18.341 -8.128,18.332 -8.135,18.324 -8.141,18.316 -8.149,18.309 -8.156,18.301 -8.164,18.295 -8.172,18.288 -8.181,18.282 -8.19,18.277 -8.199,18.272 -8.209,18.267 -8.218,18.263 -8.228,18.26 -8.238,18.257 -8.248,18.254 -8.259,18.252 -8.269,18.251 -8.28,18.25 -11.29,18.25 -11.29,19.85 -8.28,19.85
  Top Layer region: -8.848,-23.331 -8.806,-23.334 -8.765,-23.34 -8.724,-23.347 -8.683,-23.357 -8.643,-23.369 -8.603,-23.383 -8.565,-23.399 -8.527,-23.417 -8.49,-23.437 -8.454,-23.459 -8.42,-23.483 -8.387,-23.508 -8.355,-23.535 -8.324,-23.564 -8.295,-23.595 -8.268,-23.627 -8.243,-23.66 -8.219,-23.694 -8.197,-23.73 -8.177,-23.767 -8.159,-23.805 -8.143,-23.843 -8.129,-23.883 -8.117,-23.923 -8.107,-23.964 -8.1,-24.005 -8.094,-24.046 -8.091,-24.088 -8.09,-24.13 -8.091,-24.172 -8.094,-24.214 -8.1,-24.255 -8.107,-24.296 -8.117,-24.337 -8.129,-24.377 -8.143,-24.417 -8.159,-24.455 -8.177,-24.493 -8.197,-24.53 -8.219,-24.566 -8.243,-24.6 -8.268,-24.633 -8.295,-24.665 -8.324,-24.696 -8.355,-24.725 -8.387,-24.752 -8.42,-24.777 -8.454,-24.801 -8.49,-24.823 -8.527,-24.843 -8.565,-24.861 -8.603,-24.877 -8.643,-24.891 -8.683,-24.903 -8.724,-24.913 -8.765,-24.92 -8.806,-24.926 -8.848,-24.929 -8.89,-24.93 -11.29,-24.93 -11.29,-23.33 -8.89,-23.33
  Top Layer region: -8.848,-20.791 -8.806,-20.794 -8.765,-20.8 -8.724,-20.807 -8.683,-20.817 -8.643,-20.829 -8.603,-20.843 -8.565,-20.859 -8.527,-20.877 -8.49,-20.897 -8.454,-20.919 -8.42,-20.943 -8.387,-20.968 -8.355,-20.995 -8.324,-21.024 -8.295,-21.055 -8.268,-21.087 -8.243,-21.12 -8.219,-21.154 -8.197,-21.19 -8.177,-21.227 -8.159,-21.265 -8.143,-21.303 -8.129,-21.343 -8.117,-21.383 -8.107,-21.424 -8.1,-21.465 -8.094,-21.506 -8.091,-21.548 -8.09,-21.59 -8.091,-21.632 -8.094,-21.674 -8.1,-21.715 -8.107,-21.756 -8.117,-21.797 -8.129,-21.837 -8.143,-21.877 -8.159,-21.915 -8.177,-21.953 -8.197,-21.99 -8.219,-22.026 -8.243,-22.06 -8.268,-22.093 -8.295,-22.125 -8.324,-22.156 -8.355,-22.185 -8.387,-22.212 -8.42,-22.237 -8.454,-22.261 -8.49,-22.283 -8.527,-22.303 -8.565,-22.321 -8.603,-22.337 -8.643,-22.351 -8.683,-22.363 -8.724,-22.373 -8.765,-22.38 -8.806,-22.386 -8.848,-22.389 -8.89,-22.39 -11.29,-22.39 -11.29,-20.79 -8.89,-20.79
  Top Layer region: -8.848,-15.711 -8.806,-15.714 -8.765,-15.72 -8.724,-15.727 -8.683,-15.737 -8.643,-15.749 -8.603,-15.763 -8.565,-15.779 -8.527,-15.797 -8.49,-15.817 -8.454,-15.839 -8.42,-15.863 -8.387,-15.888 -8.355,-15.915 -8.324,-15.944 -8.295,-15.975 -8.268,-16.007 -8.243,-16.04 -8.219,-16.074 -8.197,-16.11 -8.177,-16.147 -8.159,-16.185 -8.143,-16.223 -8.129,-16.263 -8.117,-16.303 -8.107,-16.344 -8.1,-16.385 -8.094,-16.426 -8.091,-16.468 -8.09,-16.51 -8.091,-16.552 -8.094,-16.594 -8.1,-16.635 -8.107,-16.676 -8.117,-16.717 -8.129,-16.757 -8.143,-16.797 -8.159,-16.835 -8.177,-16.873 -8.197,-16.91 -8.219,-16.946 -8.243,-16.98 -8.268,-17.013 -8.295,-17.045 -8.324,-17.076 -8.355,-17.105 -8.387,-17.132 -8.42,-17.157 -8.454,-17.181 -8.49,-17.203 -8.527,-17.223 -8.565,-17.241 -8.603,-17.257 -8.643,-17.271 -8.683,-17.283 -8.724,-17.293 -8.765,-17.3 -8.806,-17.306 -8.848,-17.309 -8.89,-17.31 -11.29,-17.31 -11.29,-15.71 -8.89,-15.71
  Top Layer region: -8.848,-13.171 -8.806,-13.174 -8.765,-13.18 -8.724,-13.187 -8.683,-13.197 -8.643,-13.209 -8.603,-13.223 -8.565,-13.239 -8.527,-13.257 -8.49,-13.277 -8.454,-13.299 -8.42,-13.323 -8.387,-13.348 -8.355,-13.375 -8.324,-13.404 -8.295,-13.435 -8.268,-13.467 -8.243,-13.5 -8.219,-13.534 -8.197,-13.57 -8.177,-13.607 -8.159,-13.645 -8.143,-13.683 -8.129,-13.723 -8.117,-13.763 -8.107,-13.804 -8.1,-13.845 -8.094,-13.886 -8.091,-13.928 -8.09,-13.97 -8.091,-14.012 -8.094,-14.054 -8.1,-14.095 -8.107,-14.136 -8.117,-14.177 -8.129,-14.217 -8.143,-14.257 -8.159,-14.295 -8.177,-14.333 -8.197,-14.37 -8.219,-14.406 -8.243,-14.44 -8.268,-14.473 -8.295,-14.505 -8.324,-14.536 -8.355,-14.565 -8.387,-14.592 -8.42,-14.617 -8.454,-14.641 -8.49,-14.663 -8.527,-14.683 -8.565,-14.701 -8.603,-14.717 -8.643,-14.731 -8.683,-14.743 -8.724,-14.753 -8.765,-14.76 -8.806,-14.766 -8.848,-14.769 -8.89,-14.77 -11.29,-14.77 -11.29,-13.17 -8.89,-13.17
  Top Layer region: -8.848,-10.631 -8.806,-10.634 -8.765,-10.64 -8.724,-10.647 -8.683,-10.657 -8.643,-10.669 -8.603,-10.683 -8.565,-10.699 -8.527,-10.717 -8.49,-10.737 -8.454,-10.759 -8.42,-10.783 -8.387,-10.808 -8.355,-10.835 -8.324,-10.864 -8.295,-10.895 -8.268,-10.927 -8.243,-10.96 -8.219,-10.994 -8.197,-11.03 -8.177,-11.067 -8.159,-11.105 -8.143,-11.143 -8.129,-11.183 -8.117,-11.223 -8.107,-11.264 -8.1,-11.305 -8.094,-11.346 -8.091,-11.388 -8.09,-11.43 -8.091,-11.472 -8.094,-11.514 -8.1,-11.555 -8.107,-11.596 -8.117,-11.637 -8.129,-11.677 -8.143,-11.717 -8.159,-11.755 -8.177,-11.793 -8.197,-11.83 -8.219,-11.866 -8.243,-11.9 -8.268,-11.933 -8.295,-11.965 -8.324,-11.996 -8.355,-12.025 -8.387,-12.052 -8.42,-12.077 -8.454,-12.101 -8.49,-12.123 -8.527,-12.143 -8.565,-12.161 -8.603,-12.177 -8.643,-12.191 -8.683,-12.203 -8.724,-12.213 -8.765,-12.22 -8.806,-12.226 -8.848,-12.229 -8.89,-12.23 -11.29,-12.23 -11.29,-10.63 -8.89,-10.63
  Top Layer region: -8.848,-8.091 -8.806,-8.094 -8.765,-8.1 -8.724,-8.107 -8.683,-8.117 -8.643,-8.129 -8.603,-8.143 -8.565,-8.159 -8.527,-8.177 -8.49,-8.197 -8.454,-8.219 -8.42,-8.243 -8.387,-8.268 -8.355,-8.295 -8.324,-8.324 -8.295,-8.355 -8.268,-8.387 -8.243,-8.42 -8.219,-8.454 -8.197,-8.49 -8.177,-8.527 -8.159,-8.565 -8.143,-8.603 -8.129,-8.643 -8.117,-8.683 -8.107,-8.724 -8.1,-8.765 -8.094,-8.806 -8.091,-8.848 -8.09,-8.89 -8.091,-8.932 -8.094,-8.974 -8.1,-9.015 -8.107,-9.056 -8.117,-9.097 -8.129,-9.137 -8.143,-9.177 -8.159,-9.215 -8.177,-9.253 -8.197,-9.29 -8.219,-9.326 -8.243,-9.36 -8.268,-9.393 -8.295,-9.425 -8.324,-9.456 -8.355,-9.485 -8.387,-9.512 -8.42,-9.537 -8.454,-9.561 -8.49,-9.583 -8.527,-9.603 -8.565,-9.621 -8.603,-9.637 -8.643,-9.651 -8.683,-9.663 -8.724,-9.673 -8.765,-9.68 -8.806,-9.686 -8.848,-9.689 -8.89,-9.69 -11.29,-9.69 -11.29,-8.09 -8.89,-8.09
  Top Layer region: -8.848,-3.011 -8.806,-3.014 -8.765,-3.02 -8.724,-3.027 -8.683,-3.037 -8.643,-3.049 -8.603,-3.063 -8.565,-3.079 -8.527,-3.097 -8.49,-3.117 -8.454,-3.139 -8.42,-3.163 -8.387,-3.188 -8.355,-3.215 -8.324,-3.244 -8.295,-3.275 -8.268,-3.307 -8.243,-3.34 -8.219,-3.374 -8.197,-3.41 -8.177,-3.447 -8.159,-3.485 -8.143,-3.523 -8.129,-3.563 -8.117,-3.603 -8.107,-3.644 -8.1,-3.685 -8.094,-3.726 -8.091,-3.768 -8.09,-3.81 -8.091,-3.852 -8.094,-3.894 -8.1,-3.935 -8.107,-3.976 -8.117,-4.017 -8.129,-4.057 -8.143,-4.097 -8.159,-4.135 -8.177,-4.173 -8.197,-4.21 -8.219,-4.246 -8.243,-4.28 -8.268,-4.313 -8.295,-4.345 -8.324,-4.376 -8.355,-4.405 -8.387,-4.432 -8.42,-4.457 -8.454,-4.481 -8.49,-4.503 -8.527,-4.523 -8.565,-4.541 -8.603,-4.557 -8.643,-4.571 -8.683,-4.583 -8.724,-4.593 -8.765,-4.6 -8.806,-4.606 -8.848,-4.609 -8.89,-4.61 -11.29,-4.61 -11.29,-3.01 -8.89,-3.01
  Top Layer region: -8.848,-0.471 -8.806,-0.474 -8.765,-0.48 -8.724,-0.487 -8.683,-0.497 -8.643,-0.509 -8.603,-0.523 -8.565,-0.539 -8.527,-0.557 -8.49,-0.577 -8.454,-0.599 -8.42,-0.623 -8.387,-0.648 -8.355,-0.675 -8.324,-0.704 -8.295,-0.735 -8.268,-0.767 -8.243,-0.8 -8.219,-0.834 -8.197,-0.87 -8.177,-0.907 -8.159,-0.945 -8.143,-0.983 -8.129,-1.023 -8.117,-1.063 -8.107,-1.104 -8.1,-1.145 -8.094,-1.186 -8.091,-1.228 -8.09,-1.27 -8.091,-1.312 -8.094,-1.354 -8.1,-1.395 -8.107,-1.436 -8.117,-1.477 -8.129,-1.517 -8.143,-1.557 -8.159,-1.595 -8.177,-1.633 -8.197,-1.67 -8.219,-1.706 -8.243,-1.74 -8.268,-1.773 -8.295,-1.805 -8.324,-1.836 -8.355,-1.865 -8.387,-1.892 -8.42,-1.917 -8.454,-1.941 -8.49,-1.963 -8.527,-1.983 -8.565,-2.001 -8.603,-2.017 -8.643,-2.031 -8.683,-2.043 -8.724,-2.053 -8.765,-2.06 -8.806,-2.066 -8.848,-2.069 -8.89,-2.07 -11.29,-2.07 -11.29,-0.47 -8.89,-0.47
  Top Layer region: -8.848,2.069 -8.806,2.066 -8.765,2.06 -8.724,2.053 -8.683,2.043 -8.643,2.031 -8.603,2.017 -8.565,2.001 -8.527,1.983 -8.49,1.963 -8.454,1.941 -8.42,1.917 -8.387,1.892 -8.355,1.865 -8.324,1.836 -8.295,1.805 -8.268,1.773 -8.243,1.74 -8.219,1.706 -8.197,1.67 -8.177,1.633 -8.159,1.595 -8.143,1.557 -8.129,1.517 -8.117,1.477 -8.107,1.436 -8.1,1.395 -8.094,1.354 -8.091,1.312 -8.09,1.27 -8.091,1.228 -8.094,1.186 -8.1,1.145 -8.107,1.104 -8.117,1.063 -8.129,1.023 -8.143,0.983 -8.159,0.945 -8.177,0.907 -8.197,0.87 -8.219,0.834 -8.243,0.8 -8.268,0.767 -8.295,0.735 -8.324,0.704 -8.355,0.675 -8.387,0.648 -8.42,0.623 -8.454,0.599 -8.49,0.577 -8.527,0.557 -8.565,0.539 -8.603,0.523 -8.643,0.509 -8.683,0.497 -8.724,0.487 -8.765,0.48 -8.806,0.474 -8.848,0.471 -8.89,0.47 -11.29,0.47 -11.29,2.07 -8.89,2.07
  Top Layer region: -8.848,4.609 -8.806,4.606 -8.765,4.6 -8.724,4.593 -8.683,4.583 -8.643,4.571 -8.603,4.557 -8.565,4.541 -8.527,4.523 -8.49,4.503 -8.454,4.481 -8.42,4.457 -8.387,4.432 -8.355,4.405 -8.324,4.376 -8.295,4.345 -8.268,4.313 -8.243,4.28 -8.219,4.246 -8.197,4.21 -8.177,4.173 -8.159,4.135 -8.143,4.097 -8.129,4.057 -8.117,4.017 -8.107,3.976 -8.1,3.935 -8.094,3.894 -8.091,3.852 -8.09,3.81 -8.091,3.768 -8.094,3.726 -8.1,3.685 -8.107,3.644 -8.117,3.603 -8.129,3.563 -8.143,3.523 -8.159,3.485 -8.177,3.447 -8.197,3.41 -8.219,3.374 -8.243,3.34 -8.268,3.307 -8.295,3.275 -8.324,3.244 -8.355,3.215 -8.387,3.188 -8.42,3.163 -8.454,3.139 -8.49,3.117 -8.527,3.097 -8.565,3.079 -8.603,3.063 -8.643,3.049 -8.683,3.037 -8.724,3.027 -8.765,3.02 -8.806,3.014 -8.848,3.011 -8.89,3.01 -11.29,3.01 -11.29,4.61 -8.89,4.61
  silkscreen extent -12.29,-25.5 10.5,26.8, body extent -10.5,-25.5 10.5,26.8, height 3.73
SOT89-5 [mm]
  rect 0.701x1 smd: 1(-1.486,-2.294) 2(-0.012,1.706) 2(0.014,-2.294) 3(1.513,-2.294) 4(1.515,1.706) 5(-1.486,1.706)
  Top Layer region: -0.786,-0.693 -0.786,1.807 0.814,1.807 0.814,-0.693 0.314,-1.293 0.314,-2.593 0.014,-2.593 -0.286,-2.593 -0.286,-1.293
  Top Layer region: -0.336,-1.794 0.365,-1.794 0.365,-2.794 -0.336,-2.794
  silkscreen extent -2.29,-1.59 2.21,1.01
SOT95P280X145-6N [mm]
  rrect25% 1.21x0.58 smd: 1(-1.255,0.95) 2(-1.255,0) 3(-1.255,-0.95) 4(1.255,-0.95) 5(1.255,0) 6(1.255,0.95)
  silkscreen extent -2.6,-1.56 0.8,1.56, body extent -1.4,-1.45 1.4,1.45, height 1.45
TE_2-1825027-0 [mm]
  round 1.498 hole 0.99: 1(-2.25,-1.245) 2(2.25,-1.245)
  round 1.95 hole 1.3: S1(-3.505,1.245) S2(3.505,1.245)
  silkscreen extent -3.55,-3.86 3.55,1.52

## Part data
B1 B2: library part Taster, "Taster"
BME688: library part "MIKROE-4893 - 3V3"
C1 C2 C3 C4 C5 C6 C7 C8 C9 C10 C11: "Capacitor", LatestRevisionDate=17-Jul-2002, LatestRevisionNote="Re-released for DXP Platform.", PackageDescription="Radial Cap, Thru-Hole; 2 Leads; 0.3 in Pin Spacing", PackageReference=RAD-0.3, Published=8-Jun-2000, Publisher="Altium Limited"
"CO2 Sensor": "XENSIV PAS CO2", Manufacturer="Infineon Technologies", Manufacturer Order Number=PASCO2V01, PackageReference=LG-MLGA-14-1
D1 D2: library part LED, "Diode"
"Finedust Sensor": library part Component_1
"GPS Modul": library part DT15-12PA, "DT Series 12 Position Dual Row 4.44 mm Panel Mount Receptacle", Package=None, Availability=Unavailable, MF="TE Connectivity", MP=DT15-12PA, Price=None, SnapEDA_Link=https://www.snapeda.com/parts/DT15-12PA/TE%20Connectivity%20Deutsch%20Connectors/view-part/2279777/?ref=snap
"Lithium-Io Cell": "Stecker"
PicoW: "RP2040 Raspberry Pi Pico series ARMÂ® CortexÂ®-M0+ MCU 32-Bit Embedded Evaluation Board", Package=None, Availability="In Stock", Check_prices=https://www.snapeda.com/parts/SC0915/Raspberry+Pi/view-part/?ref=eda, MF="Raspberry Pi", MP=SC0915, Price=None, Purchase-URL=https://pricing.snapeda.com/search/part/SC0915/?ref=eda, SnapEDA_Link=https://www.snapeda.com/parts/SC0915/Raspberry+Pi/view-part/?ref=snap
R1 R2: "Widerstand"
R3 R4: library part RES, "Widerstand"
S1: library part SW-SPST, "Single-Pole, Single-Throw Switch", LatestRevisionDate=17-Jul-2002, LatestRevisionNote="Re-released for DXP Platform.", PackageDescription="Switch; 2 Leads", PackageReference=SPST-2, Published=24-Mar-1999, Publisher="Altium Limited"
"Voltage Converter 12V": "Boost Switching Regulator IC Positive Adjustable 3.3V 1 Output SOT-23-6", Package="SOT-23 Texas Instruments", Digi-Key_Part_Number=296-47674-1-ND, Digi-Key_Purchase_URL=https://www.digikey.com/product-detail/en/texas-instruments/TLV61046ADBVR/296-47674-1-ND/8133043?utm_source=snapeda&utm_medium=aggregator&utm_campaign=symbol, MF="Texas Instruments", MP=TLV61046ADBVR, SnapEDA_Link=https://www.snapeda.com/parts/TLV61046ADBVR/Texas%20Instruments/view-part/985721/?ref=snap
"Voltage Regulator 3V3": library part TLV61046ADBVR, "Boost Switching Regulator IC Positive Adjustable 3.3V 1 Output SOT-23-6", Package="SOT-23 Texas Instruments", Digi-Key_Part_Number=296-47674-1-ND, Digi-Key_Purchase_URL=https://www.digikey.com/product-detail/en/texas-instruments/TLV61046ADBVR/296-47674-1-ND/8133043?utm_source=snapeda&utm_medium=aggregator&utm_campaign=symbol, MF="Texas Instruments", MP=TLV61046ADBVR, SnapEDA_Link=https://www.snapeda.com/parts/TLV61046ADBVR/Texas%20Instruments/view-part/985721/?ref=snap
?: library part B8B-XH-A(LF)(SN), "Connector Header Through Hole 8 position 0.098 (2.50mm)", Package=None, Check_prices=https://www.snapeda.com/parts/B8B-XH-A(LF)(SN)/JST+Sales+America+Inc./view-part/?ref=eda, MF="JST Sales America Inc.", MP=B8B-XH-A(LF)(SN), SnapEDA_Link=https://www.snapeda.com/parts/B8B-XH-A(LF)(SN)/JST+Sales+America+Inc./view-part/?ref=snap
L1: Code_IEC=1005, Code_JEITA=0402, LatestRevisionDate=29-May-2009, LatestRevisionNote="IPC-7351 Footprint Added.", PackageDescription="Chip Inductor", PackageReference=0402-A, Published=8-Jun-2000, Publisher="Altium Limited"

## Nets (pads, with @x,y where several pads share a name; then routed paths per layer and width w, separated by ;. In a path a pad name is that pad's centre, name@x,y a point inside that pad or via, vN(x,y) a via of type N, cw(c..) or ccw(c..) an arc to the next point about the centre after c; other vN are vias at no path point)
3V3: "CO2 Sensor.3.3" "Finedust Sensor.3.3V" "GPS Modul.12" "Voltage Converter 12V.3" "Voltage Converter 12V.4" "Voltage Converter 12V.6" "Voltage Regulator 3V3.4" ?.1 BME688.7 C1.2 C7.2 C8.2 C9.2 C10.2 C11.2 L1.1 PicoW.34 PicoW.36
12V: "CO2 Sensor.12V" "Voltage Converter 12V.5" C2.2 C3.2 C4.2 C5.2
"ADC Input": PicoW.31 R3.1 R4.2
"Batterie Out": "Voltage Regulator 3V3.3" "Voltage Regulator 3V3.5" C6.2 S1.2
GND: "CO2 Sensor.GND" "Finedust Sensor.GND" "GPS Modul.11" "Voltage Converter 12V.2" "Voltage Regulator 3V3.2" ?.2 B1.1 B2.1 BME688.8 BME688.9 C1.1 C2.1 C3.1 C4.1 C5.1 C6.1 C7.1 C8.1 C9.1 C10.1 C11.1 CHB-C-LIT1A.4 D1.2 D2.2 PicoW.3 PicoW.8 PicoW.13 PicoW.18 PicoW.23 PicoW.28 PicoW.33 PicoW.38 PicoW.D2
Net_3: ?.3 PicoW.15
Net_4: ?.4 PicoW.14
Net_5: ?.5 PicoW.12
Net_6: ?.6 PicoW.9
Net_7: ?.7 PicoW.10
Net_8: ?.8 PicoW.16
NetB1_2: B1.2 PicoW.24
NetB2_2: B2.2 PicoW.27
NetCHB-C-LIT1A_1: CHB-C-LIT1A.1 S1.1
NetCHB-C-LIT1A_2: "Lithium-Io Cell.2" CHB-C-LIT1A.2 R3.2
NetCHB-C-LIT1A_3: "Lithium-Io Cell.1" CHB-C-LIT1A.3 R4.1
NetD1_1: D1.1 R1.1
NetD2_1: D2.1 R2.1
NetL1_2: "Voltage Converter 12V.1" L1.2
NetPicoW_25: PicoW.25 R1.2
NetPicoW_26: PicoW.26 R2.2
RX: "GPS Modul.10" PicoW.2
SCL: "CO2 Sensor.SCL" "Finedust Sensor.SCL" BME688.12 PicoW.7
SDA: "CO2 Sensor.TX_SDA" "Finedust Sensor.SDA" BME688.11 PicoW.6
TX: "GPS Modul.9" PicoW.1
pads on no net: "CO2 Sensor.INT" "CO2 Sensor.PSEL" "CO2 Sensor.PWM" "CO2 Sensor.PWM_DIS" "CO2 Sensor.RX" "CO2 Sensor.SWCLK" "CO2 Sensor.SWD" "Finedust Sensor.1" "GPS Modul.1" "GPS Modul.2" "GPS Modul.3" "GPS Modul.4" "GPS Modul.5" "GPS Modul.6" "GPS Modul.7" "GPS Modul.8" "GPS Modul.MH1" "GPS Modul.MH2" "GPS Modul.MH3" "GPS Modul.MH4" "Voltage Regulator 3V3.1" B1.S1 B1.S2 B2.S1 B2.S2 BME688.1 BME688.2 BME688.3 BME688.4 BME688.5 BME688.6 BME688.10 BME688.13 BME688.14 BME688.15 BME688.16 CHB-C-LIT1A.5 CHB-C-LIT1A.6 PicoW.4 PicoW.5 PicoW.11 PicoW.17 PicoW.19 PicoW.20 PicoW.21 PicoW.22 PicoW.29 PicoW.30 PicoW.32 PicoW.35 PicoW.37 PicoW.39 PicoW.40 PicoW.A PicoW.B PicoW.C PicoW.D PicoW.D1 PicoW.D3 PicoW.TP1 PicoW.TP2 PicoW.TP3 PicoW.TP4 PicoW.TP5 PicoW.TP6 S1.3

## Text inside footprints (layer, text, board x,y; h text height)
?: Top Overlay "BUSY" at 12974.33,1625.51 h60; Top Overlay "RST" at 12974.33,1725.51 h60; Top Overlay "DC" at 12974.33,1825.51 h60; Top Overlay "CS" at 12974.33,1925.51 h60; Top Overlay "CLK" at 12974.33,2025.51 h60; Top Overlay "DIN" at 12974.33,2125.51 h60; Top Overlay "GND" at 12974.33,2225.51 h60; Top Overlay "VCC" at 12974.33,2315.51 h60